# Altium PCB KickerManager.PcbDoc
Units mm, origin at the board's own origin, x right, y up, seen from the top; angles counter-clockwise.
Board outline 46 x 58.83 mm, 4 copper layers (Component Side, Ground Plane, Power Plane, Solder Side), stack 0.778 mm thick; 41 components, 28 nets, 127 pads, 61 vias.
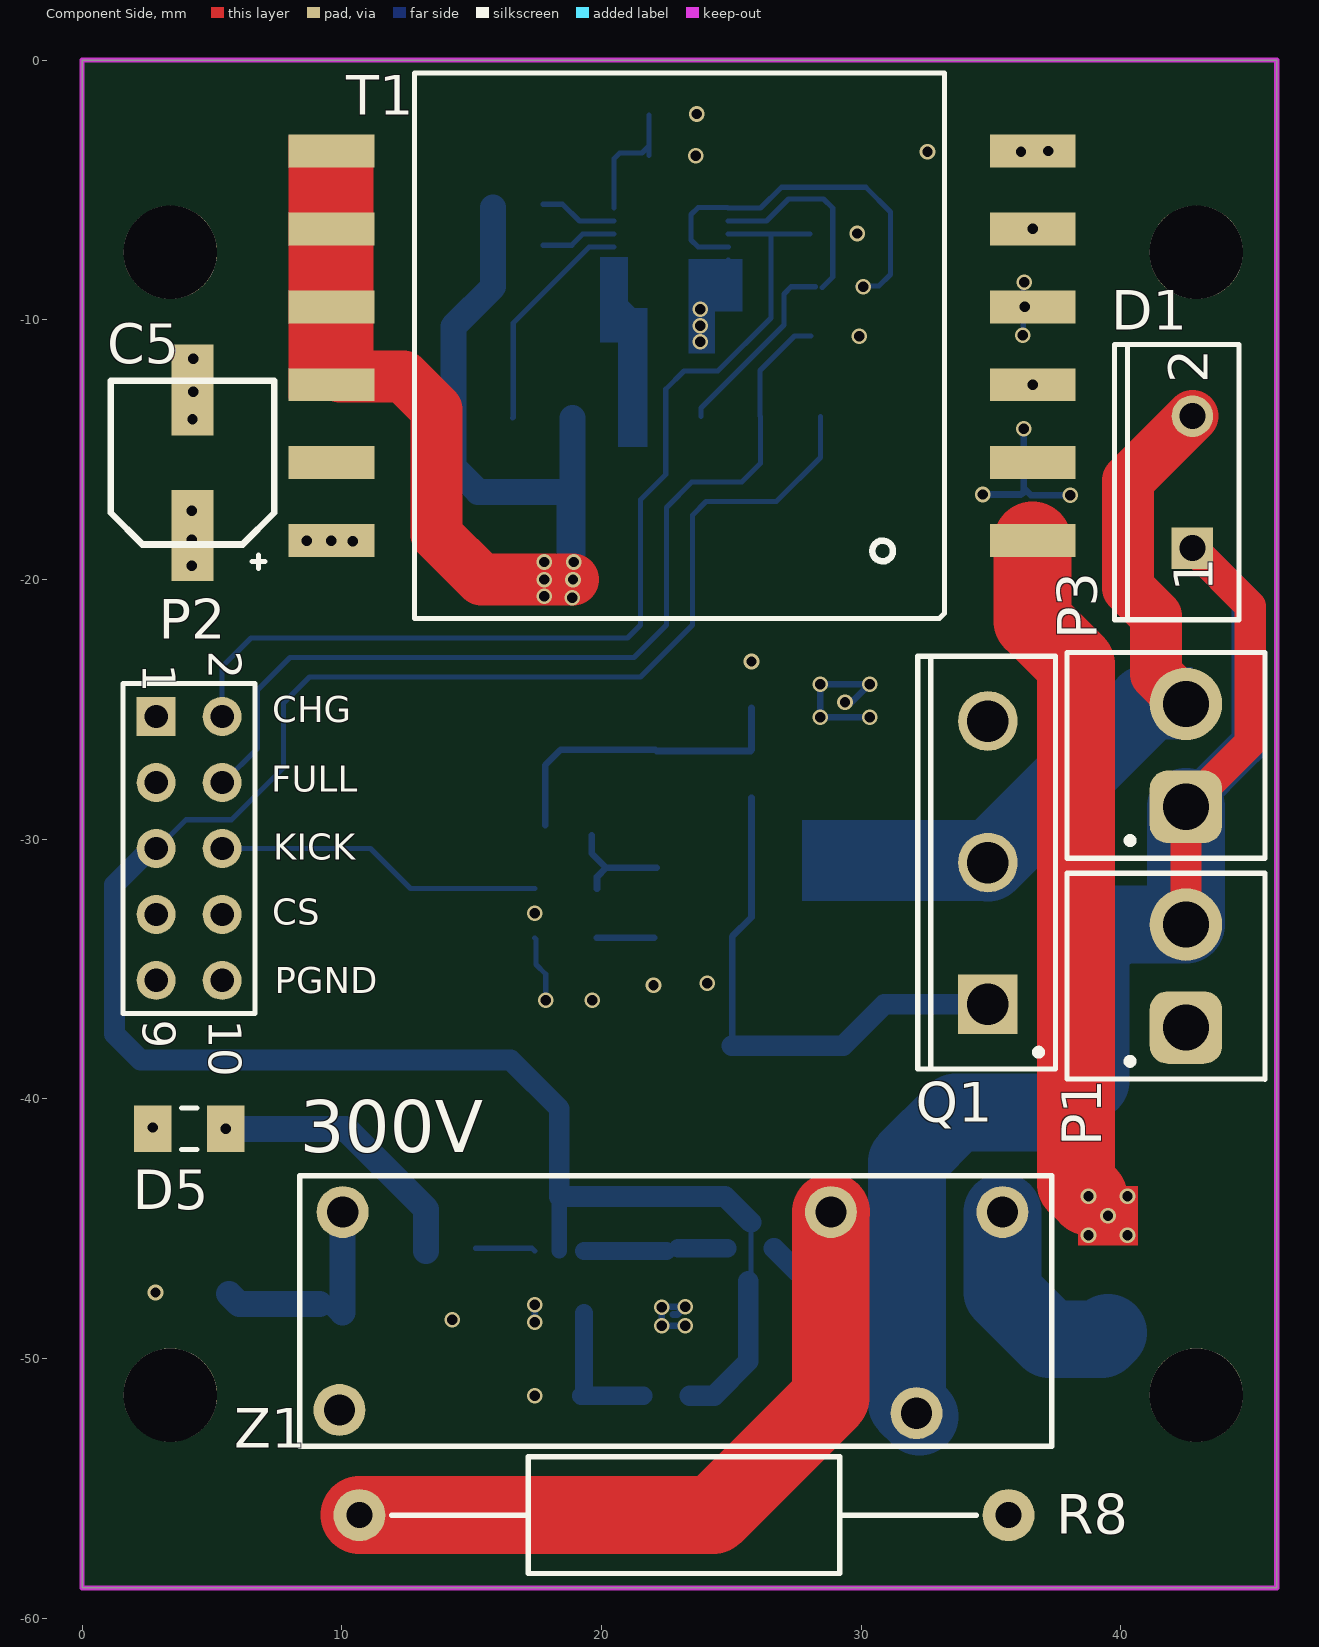
[diagram p0: Component Side view]
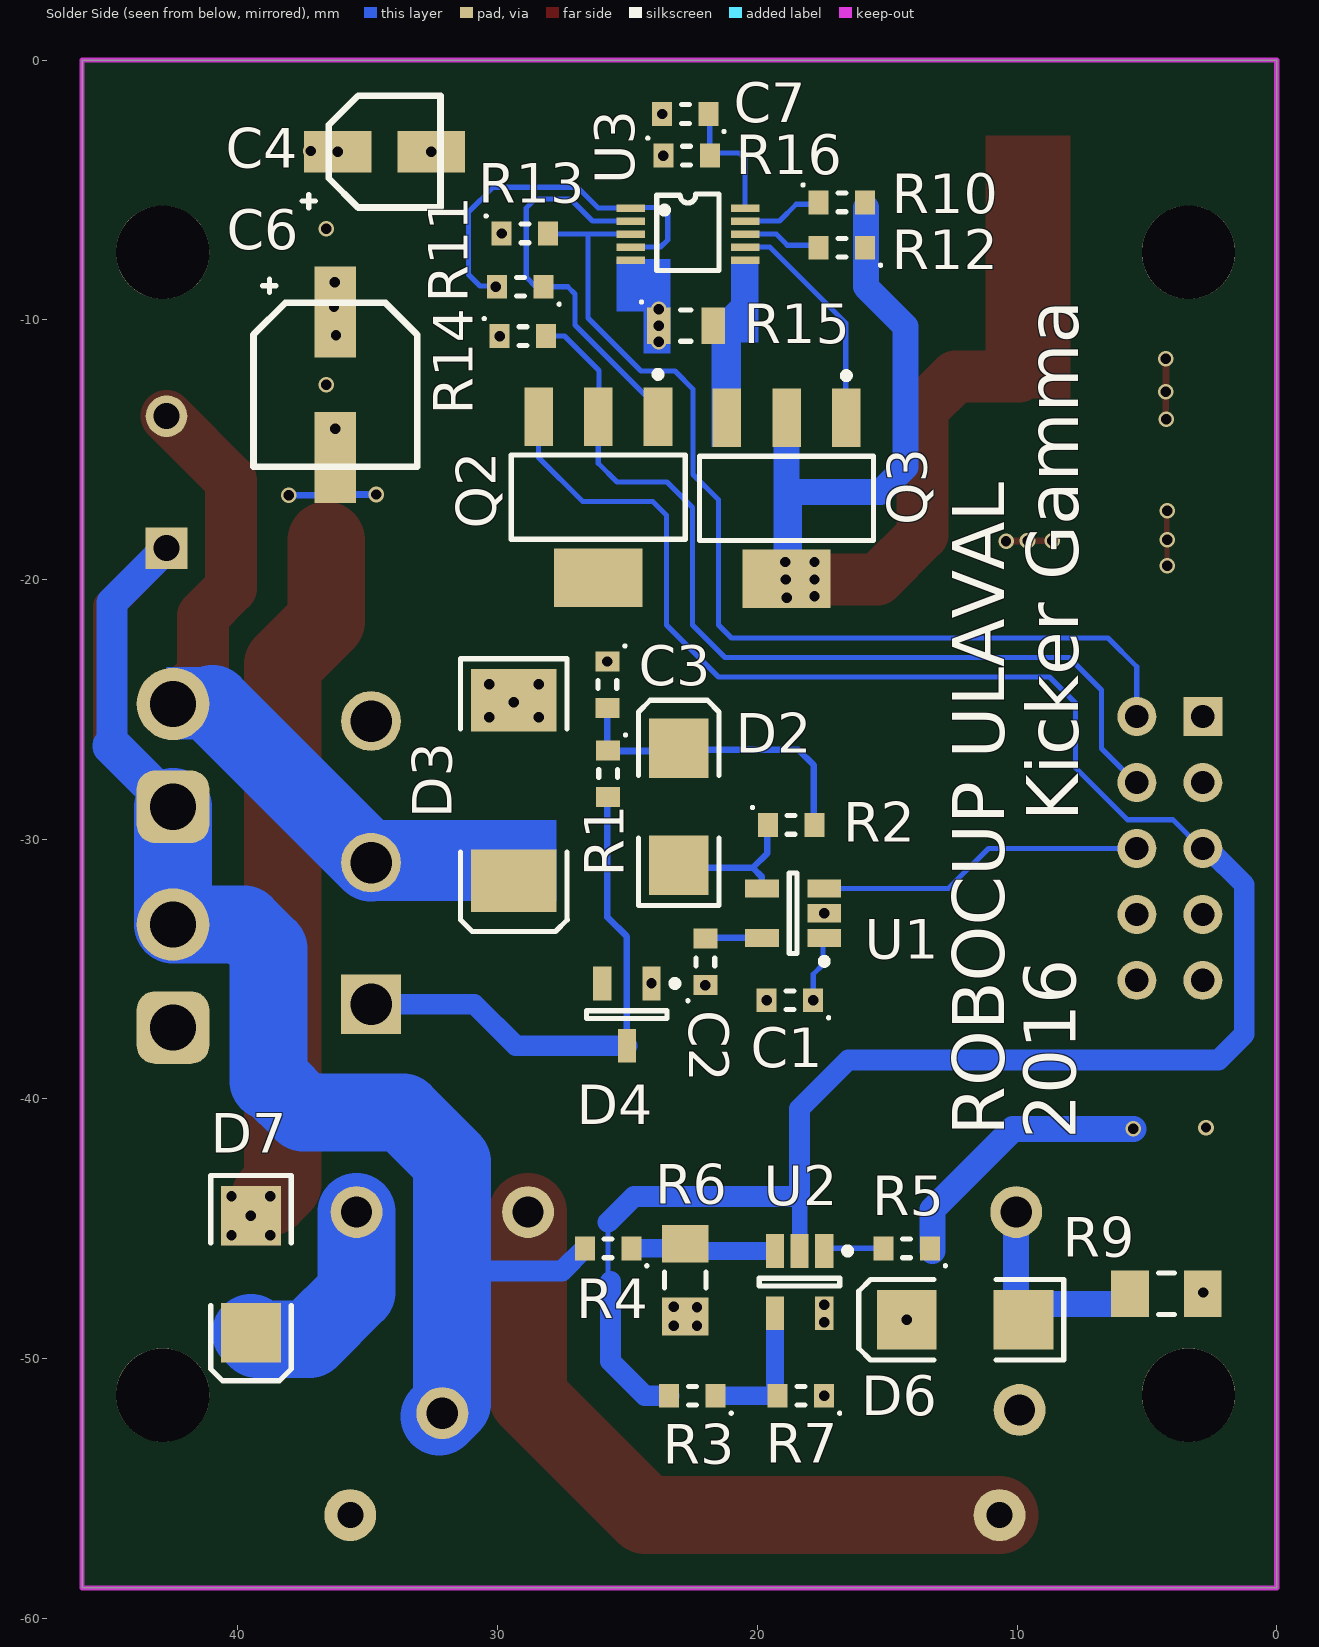
[diagram p1: Solder Side view, seen from below]
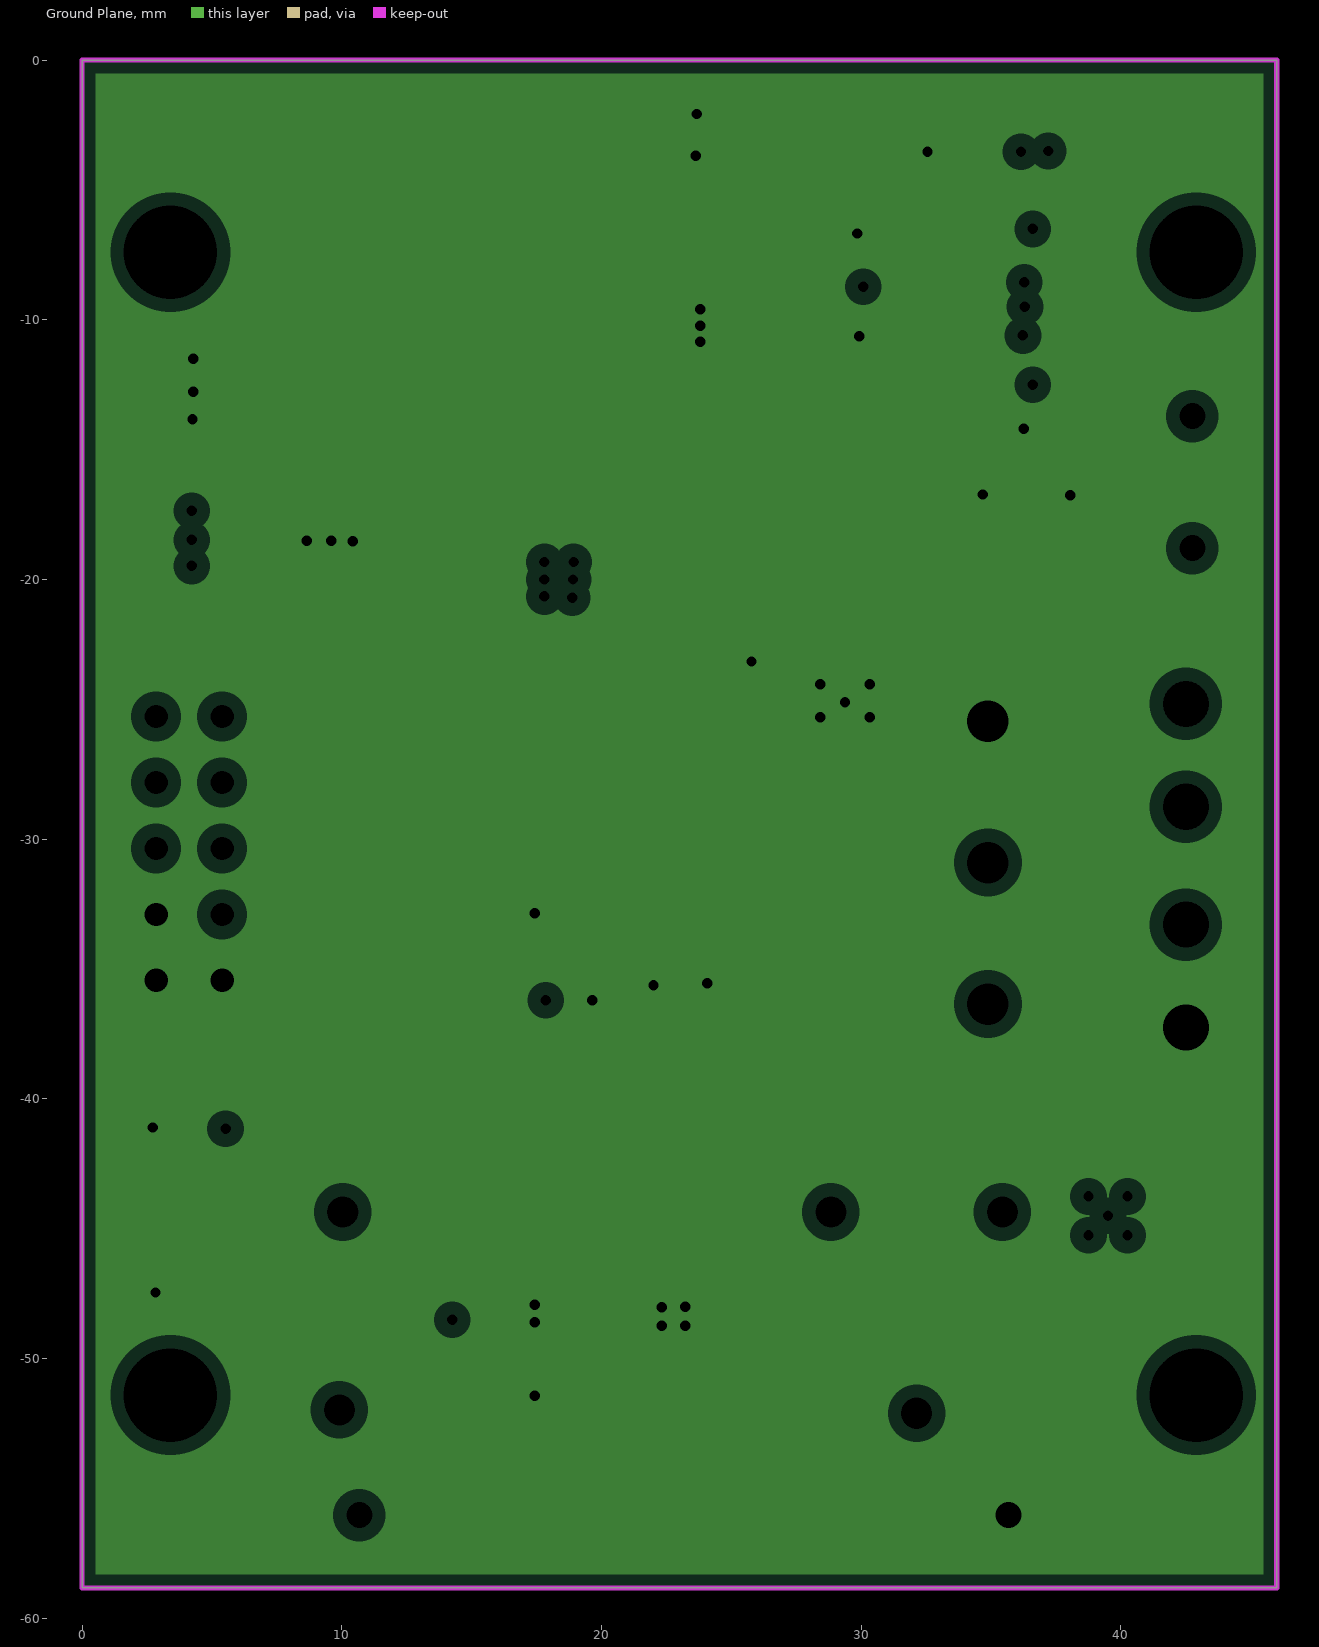
[diagram p2: Ground Plane, clearances drawn from the general rule]
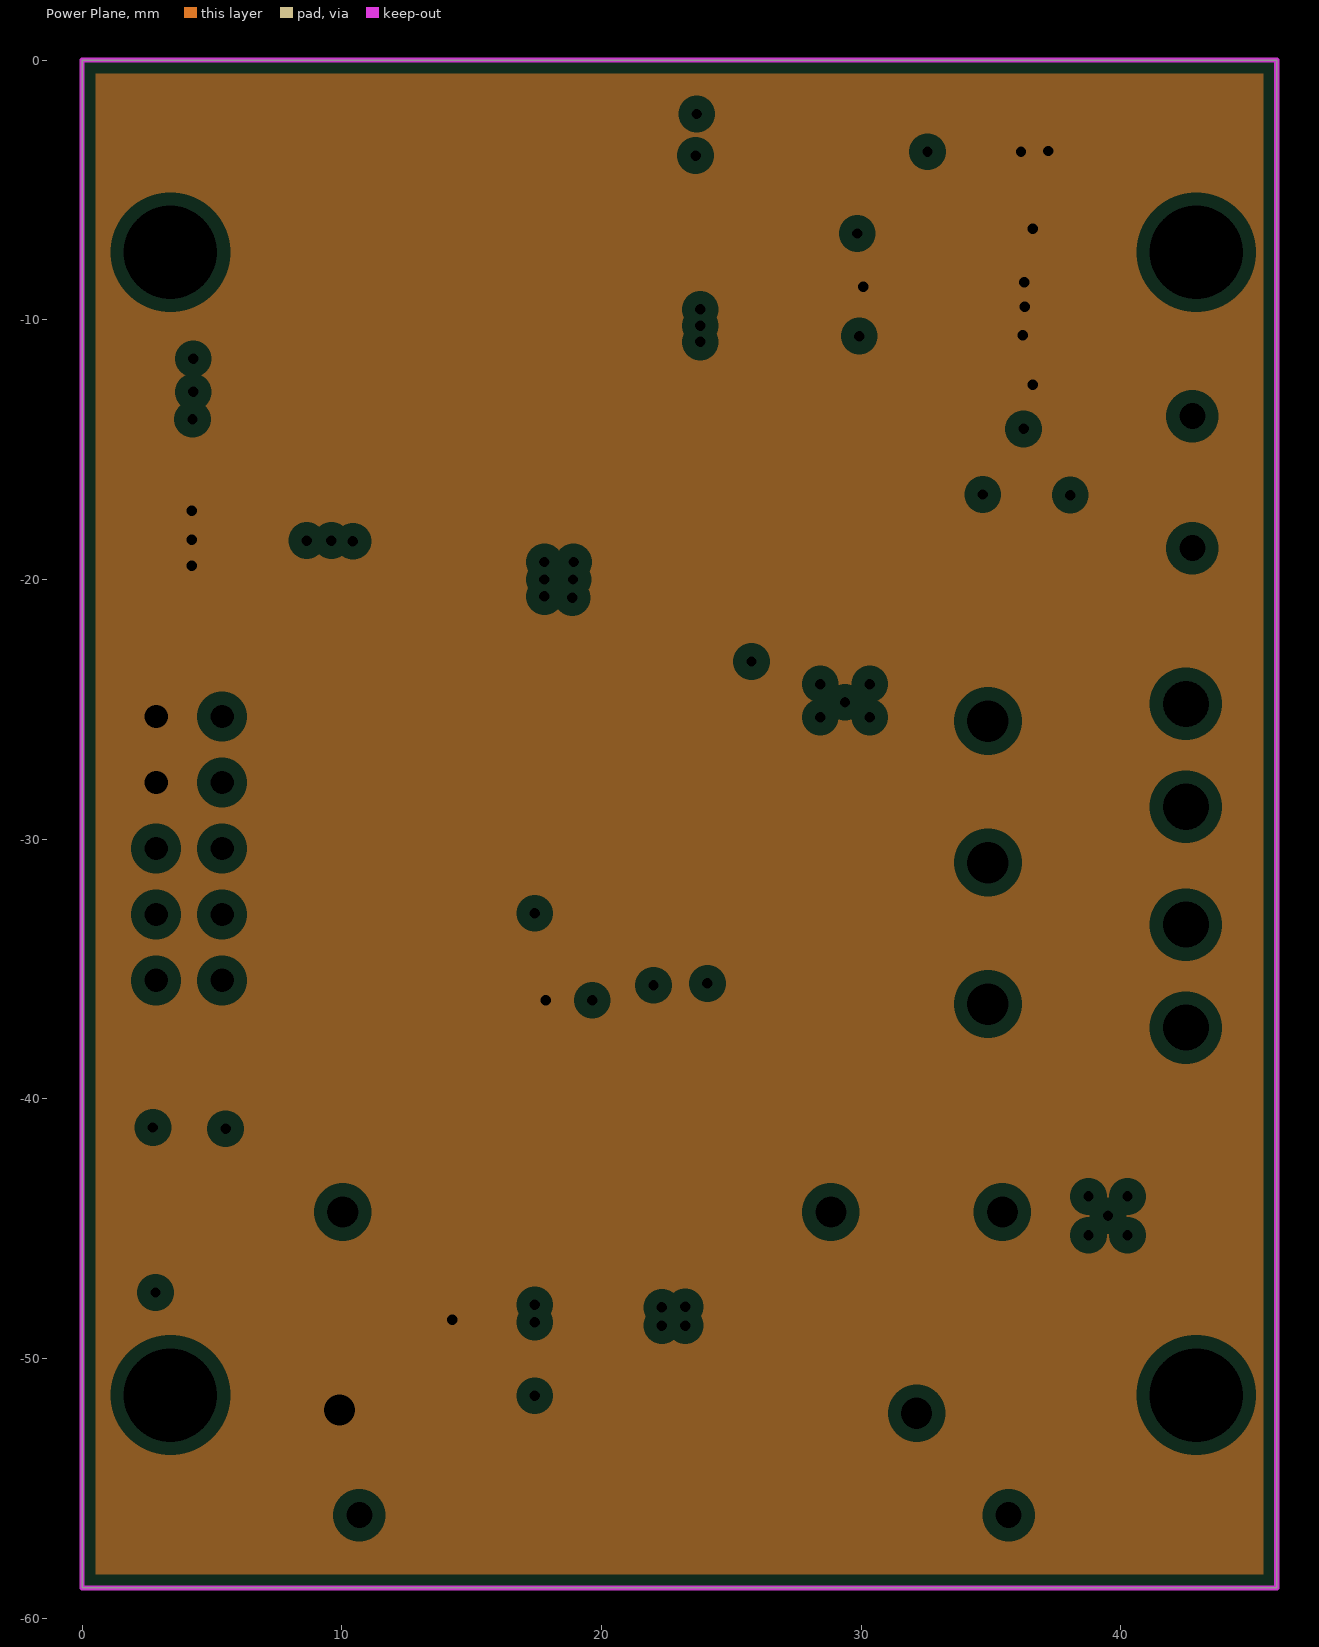
[diagram p3: Power Plane, clearances drawn from the general rule]

## Layer stack, top to bottom
Top Solder: solder mask 0.0102, Solder Resist, Dk 3.5
Component Side: signal copper 0.0356
Dielectric1: core 0.254, FR-4, Dk 4.8
Ground Plane: plane copper 0.036
Dielectric5: prepreg 0.127, Dk 4.2
Power Plane: plane copper 0.036
Dielectric6: core 0.254, Dk 4.2
Solder Side: signal copper 0.0356
Bottom Solder: solder mask 0.0102, Solder Resist, Dk 3.5

## Board outline
0,-58.825 0,0 46,0 46,-58.825

## Design rules (kind name [scope] priority, off if disabled: settings)
Clearance [All] p1: gap=0.2 ignorepadtopadclearanceinfootprint=FALSE except(0: Arc-Hole Track-Hole SMDPad-Hole THPad-Hole Via-Hole Fill-Hole Poly-Hole Region-Hole Text-Hole)
PlaneClearance [All] p1: clearance=0.508
PlaneConnect [All] p1: planeconnectstyle=Relief reliefexpansion=0.508 reliefentries=4 reliefconductorwidth=0.254 reliefairgap=0.254
PolygonConnect [All] p1: connectstyle=Relief reliefconductorwidth=0.254 reliefentries=4 polygonreliefangle="90 Angle" airgapwidth=0.254
RoutingVias [All] p1: holewidth=0.6 width=0.3 viastyle="Through Hole" minholewidth=0.4 minwidth=0.2 maxholewidth=20 maxwidth=10
SolderMaskExpansion [All] p1: expansion=0.102
Width [All] p1: maxlimit=10 minlimit=0.2 preferedwidth=0.2
28 further rules are at their usual default settings.

## Classes and differential pairs
component class PWRBankCharger: C4 C5 C6 C7 D6 D7 Q2 Q3 R8 R9 R10 R11 R12 R13 R14 R15 R16 T1 U3 Z1
component class KickTrigger: C1 C2 C3 D2 D3 D4 Q1 R1 R2 Switch_protect_1 U1
component class ProtectionLED: D5 R3 R4 R5 R6 R7 Rcond1 U2
component class KickerManager: D1 P1 P2 P3

## Components (designator, comment, footprint, x,y, rotation, side; value= is the part's Value field where it differs from the comment)
C1 "CL10B104KB8SFNC" 0603 18.75,-36.2 r0 bottom
C2 "CL10B104KB8SFNC" 0603 22,-34.725 r90 bottom
C3 "CL10B104KB8SFNC" 0603 25.775,-24.05 r270 bottom
C4 "865230340001" "CAP 4.3x4.3mm" 34.35,-3.525 r0 bottom
C5 "865080545010" "CAP 6.6x6.6mm" 4.25,-15.5 r270 top
C6 "865080545010" "CAP 6.6x6.6mm" 36.25,-12.5 r90 bottom
C7 "CL10B101KB8NNNC" 0603 22.775,-2.075 r0 bottom
D1 "Diode 1N4007" TO-220-2 42.75,-16.25 r90 top
D2 "MURS160-13-F" SMB 23.025,-28.75 r90 bottom
D3 "SMCJ350CA" SMC 29.375,-28.125 r270 bottom
D4 "PLVA668A,215" SOT-23-3 25.025,-36.75 r270 bottom
D5 "APT3216SRCPRV" 1206 4.125,-41.15 r180 top
D6 "MURS160-13-F" SMB 12,-48.5 r0 bottom
D7 "MURS160-E3/5BT" SMB 39.5,-46.75 r270 bottom
P1 "Header 2" "0.156mil header" 42.5,-37.25 r90 top
P2 "Header 5X2" HDR2X5 2.85,-25.275 r270 top
P3 "Header 2" "0.156mil header" 42.5,-28.75 r90 top
Q1 "IXGH32N120A3" "TO-247 (bent)" 34.875,-30.9 r90 top
Q2 "FQT5P10TF" SOT-223 26.125,-16.825 r0 bottom
Q3 "PHT6NQ10T,135" SOT-223 18.875,-16.875 r0 bottom
R1 "RC0603FR-0710RL" 0603 25.75,-27.475 r270 bottom
R2 "RC0603JR-0710KL" 0603 18.7,-29.45 r180 bottom
R3 "RC0603JR-071KL" 0603 22.5,-51.425 r0 bottom
R4 "RC0603FR-071ML" 0603 25.75,-45.75 r0 bottom
R5 "RC0603JR-071KL" 0603 14.25,-45.75 r0 bottom
R6 "ERJ-8GEYJ163V" 1206 22.775,-46.975 r270 bottom
R7 "ESR03EZPJ202" 0603 18.325,-51.425 r0 bottom
R8 "RWM04103901JR15E1" RWM4x10 35.675,-56.025 r180 top
R9 "CRCW1206143RFKEA" 1206 4.25,-47.5 r180 bottom
R10 "RC0603FR-0760K4L" 0603 16.75,-5.475 r180 bottom
R11 "RC0603JR-07100KL" 0603 29.125,-8.725 r0 bottom
R12 "RC0603JR-0743KL" 0603 16.75,-7.225 r0 bottom
R13 "RC0603JR-07100KL" 0603 28.95,-6.675 r180 bottom
R14 "RC0603JR-071KL" 0603 29.025,-10.625 r180 bottom
R15 "RL1220T-R012-J" 0805 22.75,-10.225 r180 bottom
R16 "RC0603FR-072K49L" 0603 22.725,-3.675 r180 bottom
T1 "DA2034-al" da2034 23,-11 r90 top
U1 "TPS2818DBVR" SOT-23-5 18.625,-32.85 r0 bottom
U2 "opamp - MCP6L71RT-E/OTCT-ND" SOT-23-5 18.375,-47.05 r270 bottom
U3 "LT3750EMS#PBF" MSOP-10 22.675,-6.6 r270 bottom
Z1 "G6RL-1 DC12" G6RL 0,-50.575 r180 top

## Footprints (in the part's own frame and the unit in brackets; to place one, negate y for a bottom-side part, rotate by r counter-clockwise, add the part's x,y. Pads: shape width x height; smd on the part's side, far side on the other; paste and mask are expansions set on the pad)
"0.156mil header" [mil] "SOIC, 4-Leads, Body 2,60x4,55mm, Pitch 1,27mm, IPC Medium Density"
  rrect50% 110x110 hole 70: 1(0,0)
  round 110 hole 70: 2(156,0)
  silkscreen extent -78,-120 234,180, body extent -78,-120 234,181, height 425
0603 [mm] "Chip 2-Leads, Body 1,60x0,80mm, IPC Medium Density"
  rect 0.77x0.92 smd: 1(-0.895,0) 2(0.895,0)
  silkscreen extent -1.54,-0.36 0.15,0.72, body extent -0.8,-0.4 0.8,0.4, height 1
0805 [mm] "Chip Capacitor, 2-Leads, Body 2,00x1,25mm, IPC Medium Density"
  rect 0.9x1.4 smd: 1(-1.05,0) 2(1.05,0)
  silkscreen extent -1.76,-0.6 0.2,0.96, body extent -1,-0.63 1,0.63, height 0.8
1206 [mm] "Chip Resistor, 2-Leads, Body 3,20x1,58mm, IPC Medium Density"
  rect 1.45x1.8 smd: 1(-1.4,0) 2(1.4,0)
  silkscreen extent -0.3,-0.8 0.3,0.8, body extent -1.7,-0.89 1.7,0.89, height 0.85
"CAP 4.3x4.3mm" [mm] "Chip"
  rect 2.6x1.6 smd: 1(1.8,0) 2(-1.8,0)
  silkscreen extent -2.15,-2.15 3.17,2.16, body extent -2.15,-2.15 2.15,2.15, height 5.5
"CAP 6.6x6.6mm" [mm] "Chip"
  rect 3.5x1.6 smd: 1(2.8,0) 2(-2.8,0)
  silkscreen extent -3.15,-3.15 4.06,3.15, body extent -3.15,-3.15 3.15,3.15, height 7.7
da2034 [mm] "Coilcraft Da2034-al"
  rect 1.27x3.3 smd: 1(-7.5,-13.6) 2(-4.5,-13.6) 3(-1.5,-13.6) 4(1.5,-13.6) 5(4.5,-13.6) 6(7.5,-13.6) 7(7.5,13.4) 8(4.5,13.4) 9(1.5,13.4) 10(-1.5,13.4) 11(-4.5,13.4) 12(-7.5,13.4)
  silkscreen extent -10.5,-10.2 10.5,10.2, body extent -10.58,-14.72 9.99,13.93, height 11.68
G6RL [mm] "Omron SPDT relay"
  round 2 hole 1.2: 1(-9.906,1.397) 2(-32.131,1.524) 3(-35.433,-6.223) 4(-28.829,-6.223) 5(-10.033,-6.223)
  silkscreen extent -37.34,-7.62 -8.38,2.79, body extent -36.98,-7.41 -8.48,2.59, height 12.3
HDR2X5 [mm] "Connector; Header; 5x2 Position"
  rect 1.5x1.5 hole 0.9: 1(0,0)
  round 1.5 hole 0.9: 2(0,2.54) 3(2.54,0) 4(2.54,2.54) 5(5.08,0) 6(5.08,2.54) 7(7.62,0) 8(7.62,2.54) 9(10.16,0) 10(10.16,2.54)
  silkscreen extent -1.27,-1.27 11.43,3.81
MSOP-10 [mm] "Shrink Small Outline, MSOP; 10 Leads; Body Width 3 mm; Pitch 0.5 mm"
  rect 0.29x1.1 smd: 1(-0.9,-2.2) 2(-0.4,-2.2) 3(0.1,-2.2) 4(0.6,-2.2) 5(1.1,-2.2) 6(1.1,2.2) 7(0.6,2.2) 8(0.1,2.2) 9(-0.4,2.2) 10(-0.9,2.2)
  silkscreen extent -1.45,-1.2 1.5,1.2, body extent -1.4,-2.45 1.6,2.45, height 1.15
RWM4x10 [mm]
  round 2 hole 1: 1(0,0) 2(25,0)
  silkscreen extent 1.25,-2.25 23.75,2.25, body extent -0.4,-2.25 25.4,2.24, height 4.5
SMB [mm] "DO-214-AA/SMB; 2 C-Bend Leads; Body 5.3 x 3.6 mm, inc. leads (LxW)"
  rect 2.3x2.3 smd: 1(-2.25,0) 2(2.25,0)
  silkscreen extent -3.8,-1.55 4.1,1.55, body extent -2.7,-1.8 2.7,1.8, height 2.5
SMC [mm] "DO-214-AB/SMC; 2 C-Bend Leads; Body 7.9 x 5.9 mm, inc. leads (LxW)"
  rect 2.4x3.3 smd: 1(-3.475,0) 2(3.475,0)
  silkscreen extent -5.07,-2.05 5.43,2.05, body extent -2.7,-2 2.7,1.6, height 2.5
SOT-23-3 [mm]
  rect 1.3x0.7 smd: 1(-1.2,0.95) 2(-1.2,-0.95) 3(1.2,0)
  silkscreen extent -1.32,-1.55 0.15,1.97, body extent -0.9,-1.55 0.9,1.55, height 1.45
SOT-23-5 [mm]
  rect 1.3x0.7 smd: 1(-1.2,0.95) 2(-1.2,0) 3(-1.2,-0.95) 4(1.2,-0.95) 5(1.2,0.95)
  silkscreen extent -1.32,-1.55 0.15,1.97, body extent -0.9,-1.55 0.9,1.55, height 1.45
SOT-223 [mm] "SOT-223/SC-73; 4 Leads; Body 6.7 x 7.3 mm, inc. leads (LxW max)"
  rect 1.1x2.25 smd: 1(-2.3,-3.1) 2(0,-3.1) 3(2.3,-3.1)
  rect 3.4x2.25 smd: 4(0,3.1)
  silkscreen extent -3.35,-4.85 3.35,1.63, body extent -3.25,-3.37 3.25,3.63, height 1.39
TO-220-2 [mm] "TO, Thru-Hole, Vertical, Heatsink Mounted; 3 In-Line Leads (1 Absent); Pitch 2.54 mm"
  rect 1.6x1.6 hole 1: 1(-2.54,0)
  round 1.6 hole 1: 2(2.54,0)
  silkscreen extent -5.3,-1.8 5.3,3, body extent -5,-1.65 5,2.85, height 19.5
"TO-247 (bent)" [mm]
  rect 2.3x2.3 hole 1.6: 1(-5.45,0)
  round 2.3 hole 1.6: 2(0,0) 3(5.45,0)
  silkscreen extent -7.95,-2.6 7.95,2.7, body extent -8,-0.28 7.9,26.7, height 6.4

## Part data
C1 C2 C3: "CAP CER 0.1UF 50V X7R 0603"
C4: "CAP 10 UF 20% 16 V"
C5 C6: "CAP 56 UF 20% 35 V"
C7: "CAP CER 100PF 50V X7R 0603"
D1: "DIODE SCHOTTKY 650V 10A TO220-2"
D2 D6: "DIODE GEN PURP 600V 1A SMB"
D3: "TVS DIODE 350VWM 567VC SMC"
D4: "DIODE ZENER 6.8V 250MW SOT23"
D5: "LED RED CLEAR 1206 SMD"
D7: "DIODE GEN PURP 600V 2A DO214AA"
P1 P3: library part "Header 2pin 0.156", "Header, 2-Pin, 0.156mil"
P2: "Header, 5-Pin, Dual row"
Q1: "IGBT 1200V 75A 300W TO247"
Q2: "MOSFET P-CH 100V 1A SOT-223"
Q3: "MOSFET N-CH 100V 3A SOT223"
R1: "RES SMD 10 OHM 1% 1/10W 0603"
R2: "RES SMD 10K OHM 5% 1/10W 0603"
R3 R5 R14: "RES SMD 1K OHM 5% 1/10W 0603"
R4: "RES SMD 1M OHM 1% 1/10W 0603"
R6: "RES SMD 16K OHM 5% 1/4W 1206"
R7: "RES SMD 2K OHM 5% 1/4W 0603"
R8: "RES WIREWOUND 3.9K OHM 3W"
R9: "RES SMD 143 OHM 1% 1/4W 1206"
R10: "RES SMD 60.4K OHM 1% 1/10W 0603"
R11 R13: "RES SMD 100K OHM 5% 1/10W 0603"
R12: "RES SMD 43K OHM 5% 1/10W 0603"
R15: "RES SMD 0.012 OHM 5% 1/4W 0805"
R16: "RES SMD 2.49K OHM 1% 1/10W 0603"
U1: "IC INVERTING FET DRVR SOT-23-5"
U2: library part "IC OPAMP GP 2MHZ RRO SOT23-5", "FET Operational Amplifier"
U3: "IC CONVERTER 10-MSOP"
Z1: "RELAY GEN PURPOSE SPDT 8A 12V"

## Free pads (board coordinates)
  round 3.6 hole 3.6: 1(3.4,-51.399) 1(3.4,-7.399) 1(42.9,-7.399) 1(42.9,-51.399)

## Via types
v1: diameter 0.6, hole 0.4, Component Side to Solder Side, 61 vias

## Nets (pads, with @x,y where several pads share a name; then routed paths per layer and width w, separated by ;. In a path a pad name is that pad's centre, name@x,y a point inside that pad or via, vN(x,y) a via of type N, cw(c..) or ccw(c..) an arc to the next point about the centre after c; other vN are vias at no path point)
5VA: P2.5 Q2.3 R3.2 U2.2 | length 85
  Solder Side w0.2: P2.5@2.645,-30.355 P2.5 2.895,-30.355 4,-29.25 5.75,-29.25 7.75,-27.25 7.75,-24.75 8.75,-23.75 21.5,-23.75 23.5,-21.75 23.5,-17.525 24.025,-17 26.725,-17 28.425,-15.3 Q2.3 ; 25.65,-47.025 25.75,-46.925 25.75,-44.75
  Solder Side w0.6: U2.2 18.375,-43.75
  Solder Side w0.8: P2.5@2.645,-30.355 1.25,-31.75 1.25,-37.5 2.25,-38.5 16.5,-38.5 18.375,-40.375 18.375,-43.75 24.75,-43.75 25.75,-44.75 ; R3.2 24.325,-51.425 25.65,-50.1 25.65,-47.025
NetC2_2: C2.2 U1.5 | length 2.2
  Solder Side w0.254: U1.5 C2.2@22.025,-33.8
NetC3_2: C3.2 D2.2 R1.1 R2.2 | length 12.1
  Solder Side w0.254: R2.2@17.83,-29.45 17.83,-27.145 18.425,-26.55 22.075,-26.55 22.125,-26.6 R1.1@25.75,-26.6 ; R1.1 25.775,-26.555 C3.2
NetC7_1: C7.1 R16.2 U3.10 | length 4.9
  Solder Side w0.2: U3.10 20.475,-3.8 20.7,-3.575 21.555,-3.575 R16.2@21.78,-3.35 ; R16.2 C7.1@21.83,-2.125
NetD1_1: D1.1 P1.2 P3.1 R4.2 Z1.2 | length 66.6
  Component Side w1.2: P1.2 P3.1 44.975,-26.275 44.975,-21.015 D1.1
  Solder Side w0.8: R4.2 27.52,-46.625 32.631,-46.625
  Solder Side w1.2: D1.1 44.847,-20.887 44.847,-26.403
  Solder Side w1.5: P3.1 44.847,-26.403
  Solder Side w2: 38.7,-39.3 38.825,-39.3
  Solder Side w3: Z1.2@32.25,-52.225 31.756,-51.731 31.756,-42.419 33.65,-40.525 37.475,-40.525 38.7,-39.3 ; 38.825,-39.3 38.825,-34.225 39.762,-33.288 P1.2 P3.1
NetD1_2: D1.2 D3.2 P3.2 Q1.2 | length 24.2
  Component Side w2: P3.2 41.35,-23.638 41.35,-21.4 40.275,-20.325 40.275,-16.185 D1.2
  Solder Side w0.2: D3.2 D3.2@29.975,-31 ; Q1.2@34.775,-31 Q1.2
  Solder Side w2: 40.987,-24.788 P3.2
  Solder Side w3: Q1.2 40.987,-24.788
NetD2_1: D2.1 R2.1 U1.4 | length 4.4
  Solder Side w0.254: R2.1@19.62,-29.85 19.62,-30.545 20.175,-31.1 ; U1.4 19.825,-31.45 20.175,-31.1 ; D2.1@22.125,-31.1 20.175,-31.1
NetD4_3: D4.3 Q1.1 R1.2 | length 20.4
  Solder Side w0.254: D4.3 25.025,-33.75 25.775,-33 R1.2@25.775,-28.395
  Solder Side w0.8: D4.3 29.3,-37.95 30.9,-36.35 Q1.1
NetD5_1: D5.1 R5.1 | length 10.8
  Solder Side w0.2: R5.1@13.25,-45.855 R5.1
  Solder Side w1: v1(5.525,-41.15) 10.15,-41.15 13.25,-44.25 R5.1@13.25,-45.855
NetD6_1: D6.1 R9.1 Z1.5 | length 8.8
  Solder Side w0.2: D6.1@9.15,-47.9 D6.1 D6.1@10.033,-48.217
  Solder Side w1: R9.1 6.05,-47.9 D6.1@9.15,-47.9 ; D6.1@10.033,-48.217 Z1.5
NetD7_1: D7.1 T1.1 | length 31.7
  Component Side w3: T1.1 36.6,-21.6 38.275,-23.275 38.275,-43.275 v1(38.75,-43.75)
  Solder Side w0.2: v1(39.5,-44.5) v1(40.25,-43.75) v1(38.75,-43.75) v1(38.75,-45.25) v1(40.25,-45.25)
NetD7_2: D7.2 Z1.3 | length 8
  Solder Side w3: Z1.3 35.433,-47.433 37.25,-49.25 39.25,-49.25 D7.2
NetP2_2: P2.2 R13.2 U3.3 | length 39.7
  Solder Side w0.2: P2.2 5.39,-23.36 6.5,-22.25 21,-22.25 21.5,-21.75 21.5,-16.925 22.475,-15.95 22.475,-12.675 23.175,-11.975 24.475,-11.975 26.525,-9.925 26.525,-6.7 ; U3.3 26.525,-6.7 ; R13.2@28.03,-6.7 26.525,-6.7
NetP2_4: P2.4 Q2.2 R14.2 | length 35.9
  Solder Side w0.2: P2.4 5.435,-27.815 6.75,-26.5 6.75,-24.25 8,-23 21.25,-23 22.5,-21.75 22.5,-17.225 23.475,-16.25 25.4,-16.25 26.125,-15.525 Q2.2 26.1,-13.7 26.1,-11.95 27.425,-10.625 R14.2@28.055,-10.625
NetP2_6: P2.6 U1.3 | length 12.7
  Solder Side w0.2: P2.6 11.105,-30.355 12.65,-31.9 U1.3
NetQ2_1: Q2.1 R11.1 U3.2 | length 15.1
  Solder Side w0.2: Q2.1 23.825,-13.4 27.025,-10.2 27.025,-9 27.3,-8.725 R11.1 ; U3.2 26.35,-6.2 27.2,-5.35 28.55,-5.35 28.9,-5.7 28.9,-8.35 R11.1@28.5,-8.75
NetQ3_1: Q3.1 U3.7 | length 8.7
  Solder Side w0.2: Q3.1 16.6,-13.75 16.6,-10.125 19.525,-7.2 U3.7
NetQ3_2: Q3.2 Q3.4 R10.2 R12.1 T1.7 T1.8 T1.9 T1.10 | length 36.9
  Component Side w2: T1.10@9.925,-12.175 12.375,-12.175 13.65,-13.45 13.65,-18.275 15.375,-20 v1(17.8,-20) v1(18.9,-20)
  Solder Side w0.2: R10.2@15.825,-5.68 R10.2@15.955,-5.55
  Solder Side w1: R10.2@15.825,-5.68 15.825,-8.725 14.3,-10.25 14.3,-15.675 15.25,-16.625 18.825,-16.625 18.875,-16.575 Q3.2
  Solder Side w1.1: Q3.4@18.825,-19.925 18.825,-16.625
  other v1: 18.875,-20.7 17.8,-20.65 17.8,-19.325 18.925,-19.325
NetQ3_3: Q3.3 R15.2 U3.6 | length 1.1
  Solder Side w0.2: 20.45,-8.85 21.175,-9.575 ; U3.6@20.45,-7.725 U3.6
NetR3_1: R3.1 R7.2 U2.4 | length 5.6
  Solder Side w0.2: R7.2 R7.2@19.325,-51.32
  Solder Side w0.7: R7.2 R3.1 ; R7.2@19.325,-51.32 U2.4
NetR4_1: R4.1 R6.1 U2.3 | length 5.7
  Solder Side w0.2: R6.1@22.5,-45.85 R6.1 R6.1@22.95,-45.75
  Solder Side w0.7: U2.3 R6.1@22.5,-45.85 ; R6.1@22.95,-45.75 R4.1
NetR5_2: R5.2 U2.1 | length 2.3
  Solder Side w0.2: R5.2 17.325,-45.75 U2.1
NetR8_2: R8.2 Z1.4 | length 27.2
  Component Side w3: R8.2 24.3,-56.025 28.825,-51.5 28.825,-44.356 Z1.4
NetR10_1: R10.1 U3.9 | length 3
  Solder Side w0.2: R10.1@17.745,-5.55 18.5,-5.55 19.149,-6.199 20.474,-6.199 U3.9
NetR12_2: R12.2 U3.8 | length 2.9
  Solder Side w0.2: R12.2@17.745,-7.125 18.85,-7.125 19.275,-6.7 U3.8
PGND: C1.2 C2.1 C3.1 C4.2 C5.2 C6.2 C7.2 D3.1 D4.1 D5.2 P1.1 P2.7 P2.9 P2.10 Q1.3 R6.2 R7.1 R8.1 R9.2 R13.1 R14.1 R15.1 R16.1 T1.12 U1.2 U2.5 U3.5 | length 24.9
  Component Side w0.254: D5.2 v1(2.725,-41.1) ; v1(4.25,-13.825) 4.275,-13.8 v1(4.275,-12.775) v1(4.275,-11.5) 4.25,-11.525 C5.2 ; v1(8.65,-18.5) v1(9.6,-18.5) ; v1(9.6,-18.5) 10.4,-18.5 v1(10.425,-18.525) 9.625,-18.525 v1(9.6,-18.5)
  Solder Side w0.254: v1(2.825,-47.45) 2.85,-47.475 R9.2 ; v1(17.425,-48.6) U2.5 v1(17.425,-47.925) ; R6.2@22.75,-48.3 22.925,-48.3 v1(23.225,-48) 22.35,-48 v1(22.325,-48.025) v1(22.325,-48.725) v1(23.225,-48.725) ; v1(23.8,-10.85) v1(23.8,-10.225) v1(23.8,-9.6) ; D3.1 v1(29.375,-24.725) 29.625,-24.725 v1(30.325,-24.025) v1(28.425,-24.025) v1(28.425,-25.3) v1(30.325,-25.3) ; v1(34.675,-16.725) 36.146,-16.725 36.236,-16.635 36.25,-16.649 C6.2 ; v1(36.25,-14.2) C6.2 ; v1(38.05,-16.75) 36.525,-16.75 36.25,-16.475 C6.2
  other v1: 17.43,-51.425 19.645,-36.2 22,-35.62 24.075,-35.55 17.425,-32.85 25.775,-23.155 29.92,-10.625 29.845,-6.675 23.62,-3.675 32.55,-3.525 23.67,-2.075
SEL: P2.8
VPOWER: C1.1 C4.1 C5.1 C6.1 D6.2 P2.1 P2.3 R11.2 T1.3 T1.4 T1.5 T1.6 U1.1 U3.1 U3.4 Z1.1 | length 24.7
  Component Side w0.2: v1(4.225,-19.475) v1(4.225,-18.475) v1(4.225,-17.35) 4.25,-17.375 C5.1
  Solder Side w0.2: U1.1 17.475,-33.85 17.475,-34.825 17.85,-35.2 v1(17.85,-36.195) C1.1 ; U3.4 23.725,-7.2 23.45,-6.925 23.45,-5.95 23.725,-5.675 24.85,-5.675 U3.1 26.125,-5.7 26.929,-4.896 30.171,-4.896 31.125,-5.85 31.125,-8.25 30.675,-8.7 R11.2@29.85,-8.7 ; R11.2 v1(30.075,-8.725) ; v1(36.15,-3.525) 37.175,-3.525 v1(37.2,-3.5) ; C6.1 36.25,-10.575 v1(36.225,-10.6) 36.225,-8.6 v1(36.275,-8.55)
  other v1: 14.25,-48.5 36.6,-12.5 36.3,-9.5 36.6,-6.5
pads on no net: D4.2 Q2.4 T1.2 T1.11

## Polygon pours and split planes (outlines as drawn)
PGND on Ground Plane (split plane): 45.49,-58.315 0.51,-58.315 0.51,-0.51 45.49,-0.51
VPOWER on Power Plane (split plane): 45.49,-58.315 0.51,-58.315 0.51,-0.51 45.49,-0.51

## Keep-outs
Keep-Out Layer:
  the board outline again, w0.2

## Other copper
Component Side:
  rectangle net NetD7_1: 38.35,-45.65 40.65,-43.35
  rectangle net NetQ3_2: 7.95,-13.025 11.225,-2.9
Solder Side:
  rectangle net NetQ3_3: 19.95,-10.875 21.025,-7.575
  rectangle net NetQ3_3: 20.625,-14.9 21.775,-9.55
  rectangle net PGND: 23.35,-9.675 25.425,-7.65
  rectangle net PGND: 23.35,-11.3 24.375,-9.55
  rectangle net NetD1_2: 27.725,-32.375 34.95,-29.25
  rectangle net NetD1_2: 40.975,-26.15 42.75,-23.375

## Silkscreen, mask and mechanical layers (free items; w line width, h text height)
Top Overlay:
  text "CHG" at 7.315,-25.495 h1
  text "FULL" at 7.29,-28.17 h1
  text "KICK" at 7.365,-30.795 h1
  text "CS" at 7.315,-33.295 h1
  text "PGND" at 7.415,-35.92 h1
  text "300V" at 8.375,-42.05 h2
Bottom Overlay:
  text "Kicker Gamma" at 7.65,-29.3 h2 r270
  text "ROBOCUP ULAVAL" at 10.5,-41.425 h2 r270
  text "2016" at 7.75,-41.55 h2 r270

## Text inside footprints (layer, text, board x,y; h text height)
D1: Top Overlay "1" at 43.525,-20.475 h1.5 r90; Top Overlay "2" at 43.35,-12.45 h1.5 r90
P2: Top Overlay "10" at 4.882,-36.959 h1.27 r270; Top Overlay "9" at 2.342,-36.959 h1.27 r270; Top Overlay "1" at 2.342,-23.243 h1.27 r270; Top Overlay "2" at 4.882,-22.735 h1.27 r270